# Altium PCB PC110.PcbDoc (part 24 of 24)
Units mm, origin at the board's own origin, x right, y up, seen from the top; angles counter-clockwise.
Board outline 150.05 x 107.35 mm, 10 copper layers (In2.Cu, F.Cu, B.Cu, In1.Cu, In3.Cu, In4.Cu, In5.Cu, In6.Cu, In7.Cu, In8.Cu); 936 components, 1434 nets, 4891 pads, 6088 vias.
Unrouted connection lines stored in the file: 2995.
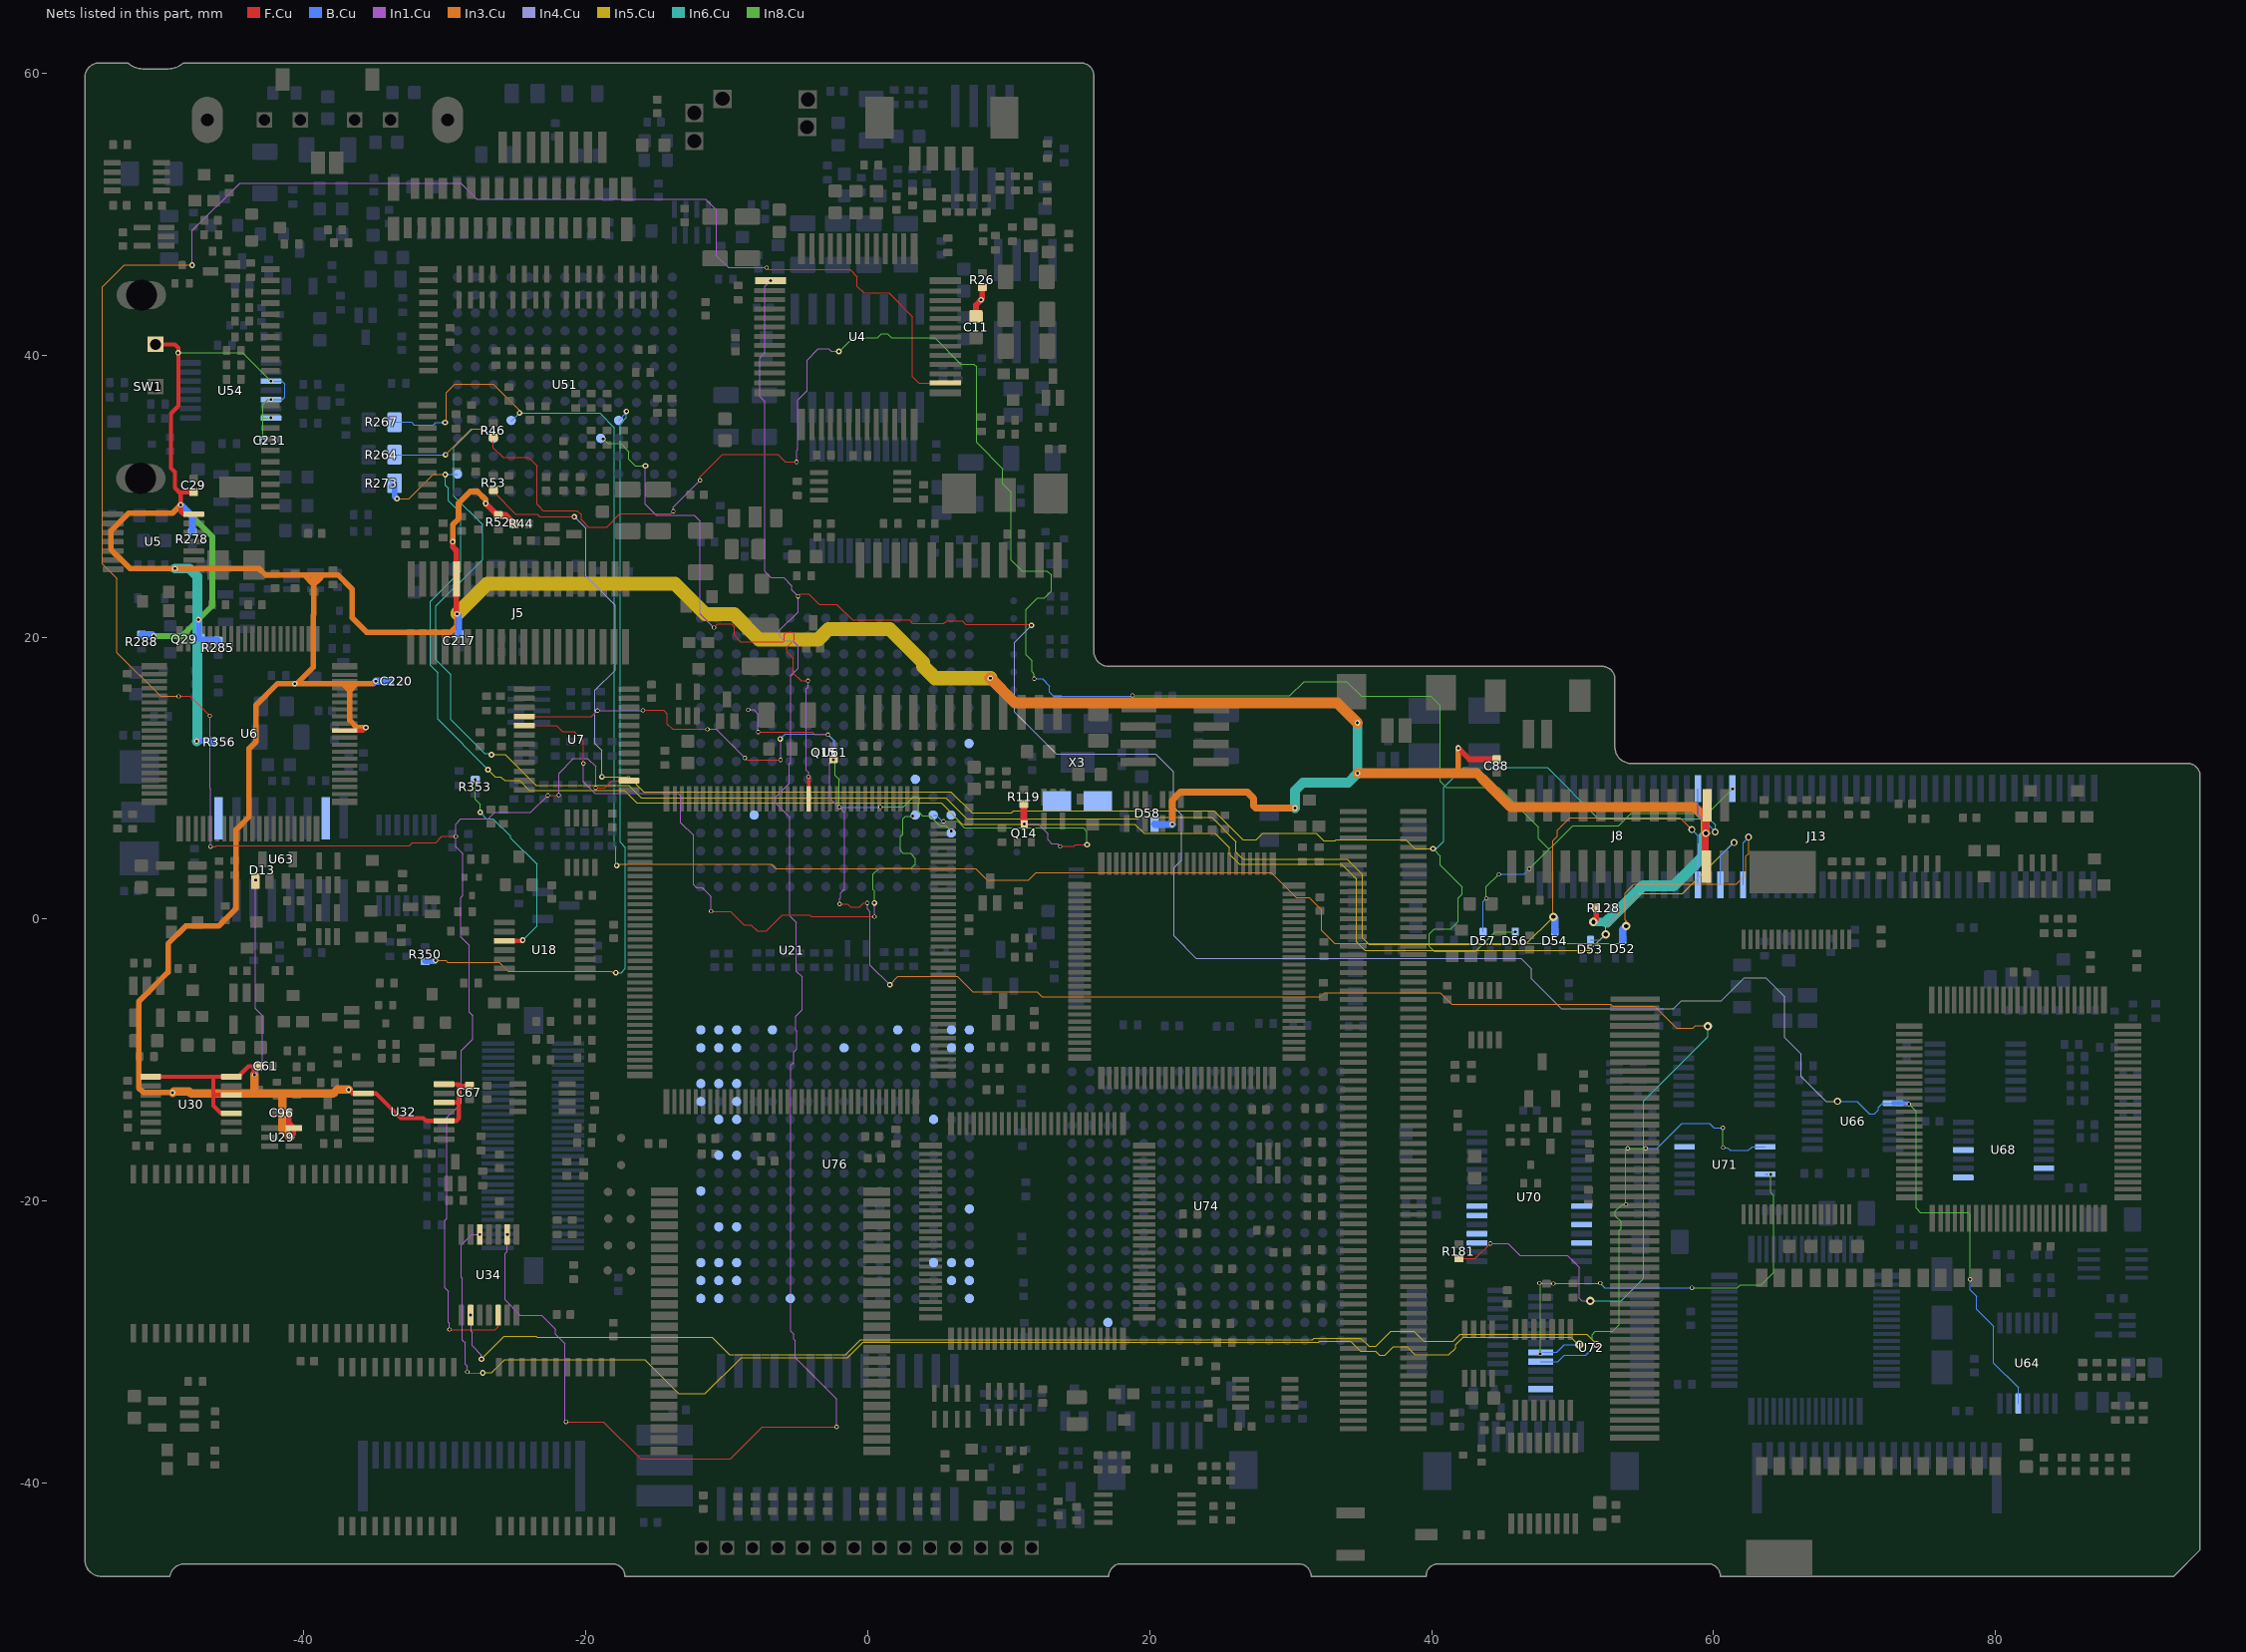
[diagram p31: the nets of this part, all layers, seen from the top]

## Via types
v1: diameter 0.3, hole 0.2, B.Cu to In8.Cu, tented both sides, 1934 vias
v2: diameter 0.4, hole 0.2, F.Cu to B.Cu, tented both sides, 1902 vias
v3: diameter 0.3, hole 0.2, F.Cu to In1.Cu, tented both sides, 1729 vias
v4: diameter 0.6, hole 0.3, F.Cu to B.Cu, tented both sides, 354 vias
v5: diameter 0.5, hole 0.3, F.Cu to B.Cu, tented both sides, 136 vias
v6: diameter 0.4, hole 0.2, B.Cu to In8.Cu, tented both sides, 12 vias
v7: diameter 0.3, hole 0.2, F.Cu to B.Cu, tented both sides, 6 vias
v8: diameter 0.6, hole 0.2, F.Cu to B.Cu, tented both sides, 4 vias
v9: diameter 0.5, hole 0.2, B.Cu to In8.Cu, tented both sides, 3 vias
v10: diameter 0.5, hole 0.2, F.Cu to B.Cu, tented both sides, 2 vias
v11: diameter 0.4, hole 0.3, F.Cu to B.Cu, tented both sides, 2 vias
v12: diameter 0.3, hole 0.2, F.Cu to In4.Cu, tented both sides, 2 vias
v13: diameter 0.6, hole 0.3, B.Cu to In8.Cu, tented both sides, 1 vias
v14: diameter 0.3, hole 0.2, F.Cu to In3.Cu, tented both sides, 1 vias

## Nets (pads, with @x,y where several pads share a name; then routed paths per layer and width w, separated by ;. In a path a pad name is that pad's centre, name@x,y a point inside that pad or via, vN(x,y) a via of type N, cw(c..) or ccw(c..) an arc to the next point about the centre after c; other vN are vias at no path point) (continued)
unconnected-(U61-PadN10): U61.N10
unconnected-(U61-PadR12): U61.R12
unconnected-(U61-PadT8): U61.T8
unconnected-(U61-RAS1-PadD12): U61.D12
unconnected-(U63-1.84MHz-Pad1): U63.1
unconnected-(U63-12MHz-Pad7): U63.7
unconnected-(U68-Pad6): U68.6
unconnected-(U68-Pad8): U68.8
unconnected-(U68-Pad11): U68.11
unconnected-(U70-APWR_GOOD#-Pad13): U70.13
unconnected-(U70-AVCC-Pad9): U70.9
unconnected-(U70-AVCC-Pad11): U70.11
unconnected-(U70-BPWR_GOOD#-Pad19): U70.19
unconnected-(U70-BVCC-Pad21): U70.21
unconnected-(U70-BVCC-Pad22): U70.22
unconnected-(U70-OC#-Pad18): U70.18
unconnected-(U71-Pad6): U71.6
unconnected-(U72-B8-Pad14): U72.14
unconnected-(U74-IRQ12-PadB3): U74.B3
unconnected-(U76-BOFF#-PadC5): U76.C5
unconnected-(U76-BREQ-PadA10): U76.A10
unconnected-(U76-BS8#-PadB6): U76.B6
unconnected-(U76-LOCK#-PadB4): U76.B4
unconnected-(U76-NC-PadA1): U76.A1
unconnected-(U76-NC-PadA2): U76.A2
unconnected-(U76-NC-PadA14): U76.A14
unconnected-(U76-NC-PadA15): U76.A15
unconnected-(U76-NC-PadA16): U76.A16
unconnected-(U76-NC-PadB1): U76.B1
unconnected-(U76-NC-PadB2): U76.B2
unconnected-(U76-NC-PadB14): U76.B14
unconnected-(U76-NC-PadB15): U76.B15
unconnected-(U76-NC-PadB16): U76.B16
unconnected-(U76-NC-PadC1): U76.C1
unconnected-(U76-NC-PadC2): U76.C2
unconnected-(U76-NC-PadC4): U76.C4
unconnected-(U76-NC-PadC6): U76.C6
unconnected-(U76-NC-PadC8): U76.C8
unconnected-(U76-NC-PadC14): U76.C14
unconnected-(U76-NC-PadC15): U76.C15
unconnected-(U76-NC-PadJ2): U76.J2
unconnected-(U76-NC-PadP6): U76.P6
unconnected-(U76-NC-PadP14): U76.P14
unconnected-(U76-NC-PadR1): U76.R1
unconnected-(U76-NC-PadR2): U76.R2
unconnected-(U76-NC-PadR14): U76.R14
unconnected-(U76-NC-PadR15): U76.R15
unconnected-(U76-NC-PadT1): U76.T1
unconnected-(U76-NC-PadT2): U76.T2
unconnected-(U76-NC-PadT11): U76.T11
unconnected-(U76-NC-PadT14): U76.T14
unconnected-(U76-NC-PadT15): U76.T15
unconnected-(U76-NC-PadT16): U76.T16
unconnected-(U76-PCD-PadC12): U76.C12
unconnected-(U76-PCHK#-PadA5): U76.A5
unconnected-(U76-PLOCK#-PadA4): U76.A4
unconnected-(U76-PWT-PadB12): U76.B12
unconnected-(U76-TCK-PadB8): U76.B8
unconnected-(U76-TDI-PadM1): U76.M1
unconnected-(U76-TDO-PadF16): U76.F16
unconnected-(U76-TMS-PadN2): U76.N2
unconnected-(U76-UP#-PadE1): U76.E1
unconnected-(X3-Pad2): X3.2
unconnected-(X3-Pad3): X3.3
UNKNOWN1: U7.4 U61.R13 | length 40.7
  F.Cu w0.08: U7.4@-24.362,14.375 -19.595,14.375 v3(-19.17,14.8) ; v3(-15.95,14.82) -14.47,14.82 -14.21,14.56 -14.21,13.84 -13.84,13.47 v3(-11.37,13.47) ; v3(-8.72,11.44) -8.58,11.3 v3(-6.18,11.3)
  In1.Cu w0.08: v3(-19.17,14.8) -15.97,14.8 v3(-15.95,14.82) ; v3(-11.37,13.47) -10.75,13.47 v3(-8.72,11.44) ; v2(-6.21,12.79) -6.18,12.76 v3(-6.18,11.3)
  In8.Cu w0.08: v1(-2.31,11.92) -2.31,10.19 -2.02,9.9 v1(-2.02,7.95) ; v1(0.9,7.96) 2.54,7.96 3.28,8.7 3.5,8.7 3.68,8.52 3.68,8.23 3.58,8.13 3.58,7.64 3.88,7.34 4.41,7.34 5.11,6.64 5.53,6.64 v1(5.92,6.25)
  B.Cu w0.08: v2(-6.21,12.79) -5.86,13.14 -2.84,13.14 -2.31,12.61 v1(-2.31,11.92) ; v1(-2.02,7.95) 0.89,7.95 v1(0.9,7.96)
UNKNOWN2: U7.5 U61.N12 | length 48
  F.Cu w0.08: U7.5@-24.362,13.725 -22.065,13.725 -21.64,13.3 -20.83,13.3 -20.17,12.64 v3(-20.17,11.05) ; v3(-11.11,0.56) -9.74,0.56 -8.78,-0.4 -8.27,-0.4 -7.84,-0.83 -7.18,-0.83 -6.05,0.3 -4.13,0.3 -4.02,0.19 0.47,0.19 v3(0.48,0.18)
  In1.Cu w0.08: v3(-20.17,11.05) -20.17,9.75 -19.35,8.93 -13.44,8.93 -13.27,8.76 -13.27,6.85 -12.36,5.94 -12.36,2.44 -12.16,2.24 -11.76,2.24 -11.11,1.59 v3(-11.11,0.56) ; v2(0.47,1.16) 0.47,0.19 v3(0.48,0.18)
  In8.Cu w0.08: v2(0.47,1.16) 0.47,2.02 0.38,2.11 0.38,3.19 0.83,3.64 3.11,3.64 3.39,3.92 3.39,4.31 3.03,4.67 2.5,4.67 2.31,4.86 2.31,5.84 2.49,6.02 2.49,7.12 2.68,7.31 v1(3.19,7.31)
VCC: C29.1 C61.1 C67.2 C88.2 C96.2 C217.1 C220.2 C231.2 D13.2 D58.2 J5.16 J8.2 J8.25 Q29.3 R44.1 R52.2 R128.1 R278.2 R285.2 R288.1 R356.2 SW1.1 U5.14 U6.71 U29.5 U30.1 U30.10 U30.12 U30.14 U32.2 U32.10 U32.12 U32.14 U54.10 U54.12 U54.14 | length 380.4
  F.Cu w0.3: U30.1@-50.86,-11.17 -46.42,-11.17 ; SW1.1@-50.52,40.77 -49.16,40.77 -48.9,40.51 -48.9,39.79 ; v2(-48.92,40.17) -48.9,40.15 -48.9,39.79 ; v2(-48.73,29.39) -48.73,29.08 ; C29.1@-47.81,30.29 -48.62,30.29 -48.73,30.18 ; U5.14@-47.807,28.72 -48.55,28.72 -48.73,28.9 -48.73,29.08 ; -45.88,-13.76 -46.42,-13.22 -46.42,-12.44 ; U30.12@-45.135,-12.47 -46.39,-12.47 -46.42,-12.44 ; v14(-43.5,-11.03) -43.55,-10.98 -43.55,-10.43 ; C61.1@-43.17,-10.43 -43.55,-10.43 ; v2(-40.95,-15.48) -40.71,-15.24 U29.5@-40.71,-14.81 ; U6.71@-37.1,13.38 -35.81,13.38 v2(-35.6,13.59) ; v2(-36.82,-12.09) -36.56,-12.35 U32.2@-35.78,-12.35 -34.89,-12.35 -33.13,-14.11 -33.12,-14.1 -31.53,-14.1 -31.33,-14.3 U32.10@-30.055,-14.3 -29.18,-14.3 -29,-14.12 -29,-12.96 ; U32.12@-30.055,-13 -29.06,-13 -29.02,-12.96 -29,-12.96 ; U32.14@-30.055,-11.7 -29.01,-11.7 ; C67.2@-28.25,-11.81 -28.9,-11.81 -29.01,-11.7 ; -48.9,39.79 -48.9,36.4 -49.43,35.87 -49.43,32 -49.15,31.72 -49.15,30.6 -48.73,30.18 ; -48.73,29.08 -48.73,30.18 ; -46.42,-12.44 -46.42,-11.17 ; -46.42,-11.17 U30.14@-45.135,-11.17 -44.67,-11.17 -43.93,-10.43 -43.55,-10.43 ; -29.01,-11.7 -29,-11.71 -29,-12.96
  F.Cu w0.4: C96.2@-41.06,-13.73 -41.06,-14.46 U29.5@-40.71,-14.81 ; v2(-29.44,26.77) -29.44,26.4 -29.18,26.14 J5.16@-29.18,24.13 -29.19,24.12 -29.19,21.72 v2(-29.13,21.66) ; v2(-27.1,29.49) -26.28,28.67 R52.2@-26.2,28.67 -25.68,28.67 R44.1@-25.06,28.05 ; v2(41.89,12.13) 42.67,11.35 C88.2@44.61,11.35 ; v4(51.48,-0.19) 51.68,0.01 R128.1@51.68,0.79
  F.Cu w0.5: J8.25@59.49,3.73 59.41,3.81 59.41,6.06 v5(59.45,6.1) 59.45,7.99 J8.2@59.54,8.08
  In1.Cu w0.08: v14(-43.5,-11.03) -42.92,-10.45 -42.92,-6.86 -43.42,-6.36 v3(-43.42,2.77)
  In3.Cu w0.08: -40.96,-15.48 v2(-40.95,-15.48) -40.95,-15.43
  In3.Cu w0.4: v2(-49.31,-12.31) -49.34,-12.28 -51.39,-12.28 -51.7,-11.97 -51.7,-5.83 -49.63,-3.76 -49.63,-1.74 -48.37,-0.48 -46.04,-0.48 -44.81,0.75 -44.81,6.34 -43.88,7.27 -43.88,12.11 -43.39,12.6 -43.39,15.18 -41.86,16.71 v2(-40.64,16.71) ; v2(-48.73,29.39) -49.32,28.8 -52.43,28.8 -53.68,27.55 -53.68,26.22 -52.33,24.87 v2(-49.14,24.87) -43.18,24.87 -42.73,24.42 -39.99,24.42 ; v2(-35.6,13.59) -36.23,13.59 -36.74,14.1 -36.74,15.94 ; v2(-34.9,16.88) -35.07,16.71 -36.23,16.71 ; v2(-29.44,26.77) -29.44,27.98 -29.02,28.4 -29.02,29.5 -28.19,30.33 -27.68,30.33 -27.1,29.75 v2(-27.1,29.49) ; v2(-29.13,21.66) -29.13,20.82 -29.6,20.35 -35.54,20.35 -36.57,21.38 -36.57,23.4 -37.59,24.42 -38.55,24.42 ; 41.87,10.35 41.89,10.37 v2(41.89,12.13) ; v2(-40.64,16.71) -37.31,16.71 ; v2(-40.64,16.71) -40.49,16.71 -39.34,17.86 -39.34,21.58 -39.3,21.62 -39.3,23.72 ; -39.99,24.42 -39.3,23.73 -39.3,23.72 ; -39.99,24.42 -39.3,24.42 ; -39.3,23.72 -39.3,24.42 ; -39.3,23.72 -38.935,24.085 ; -39.3,24.42 -38.965,24.085 -38.935,24.085 ; -39.3,24.42 -38.55,24.42 ; -38.935,24.085 -38.6,24.42 -38.55,24.42 ; -37.31,16.71 -37.25,16.71 -36.74,16.2 ; -37.31,16.71 -36.74,16.71 ; -36.74,15.94 -36.74,16.71 ; -36.74,15.94 -36.74,16.2 ; -36.74,16.2 -36.23,16.71 ; -36.74,16.71 -36.23,16.71
  In3.Cu w0.5: v2(21.6,6.73) 21.6,8.44 22.17,9.01 26.93,9.01 27.37,8.57 27.37,8.04 27.53,7.88 v2(30.3,7.88)
  In3.Cu w0.6: v2(-49.31,-12.31) -49.23,-12.23 -48.12,-12.23 -47.99,-12.36 -43.51,-12.36 ; v14(-43.5,-11.03) -43.51,-11.04 -43.51,-12.36 ; -40.96,-15.48 -41.51,-14.93 -41.51,-12.36 ; v2(-36.82,-12.09) -37.64,-12.09 -37.91,-12.36 -41.51,-12.36 ; 59.33,7.25 59.38,7.2 59.38,6.17 v5(59.45,6.1) ; -43.51,-12.36 -41.51,-12.36
  In3.Cu w0.7: v2(34.74,10.35) 41.87,10.35 43.21,10.35 43.86,9.7 45.6,7.96 46.38,7.96 58.62,7.96 59.33,7.25
  In3.Cu w0.8: v2(8.69,17.09) 10.43,15.35 33.31,15.35 v2(34.73,13.93)
  In5.Cu w1: -29.1,21.66 -29.1,21.69 -26.99,23.8 -13.68,23.8 -11.51,21.63 -9.49,21.63 -7.7,19.84 -3.51,19.84 -2.78,20.57 1.56,20.57 3.92,18.21 3.92,17.94 4.77,17.09 v2(8.69,17.09)
  In6.Cu w0.5: -47.56,21.34 v2(-47.47,21.25)
  In6.Cu w0.6: v4(51.48,-0.19) 52.42,-0.19 ; 59.26,5.23 59.26,5.91 v5(59.45,6.1)
  In6.Cu w0.7: v2(-49.14,24.87) -48.12,24.87 -47.56,24.31 -47.56,21.34 -47.56,12.67 v2(-47.6,12.63) ; v2(30.3,7.88) 30.3,9.12 30.87,9.69 34.08,9.69 v2(34.74,10.35) 34.74,13.92 v2(34.73,13.93)
  In6.Cu w0.8: 52.42,-0.19 52.89,0.28 54.98,2.37 55.37,2.37 57.17,2.37 57.73,2.93 59.26,4.46 59.26,5.23
  In8.Cu w0.08: v2(-48.92,40.17) -44.34,40.17 v1(-42.33,38.16) ; -48.73,29.37 v2(-48.73,29.39) ; v1(-42.9,33.95) -42.9,35.57 ; v1(-42.33,35.56) -42.89,35.56 -42.9,35.57 ; v1(-42.33,36.86) -42.55,36.86 -42.9,36.51 -42.9,35.57
  In8.Cu w0.4: v2(-50.65,20.08) -48.64,20.08 v2(-47.47,21.25) -46.49,22.23 -46.49,27.13 -48.73,29.37
  B.Cu w0.08: v1(-42.33,36.86) -41.53,36.86 -41.35,37.04 -41.35,37.96 -41.55,38.16 v1(-42.33,38.16)
  B.Cu w0.4: v2(-47.6,12.63) -46.54,12.63 R356.2@-46.48,12.57 ; v2(-47.47,21.25) -47.47,19.86 Q29.3@-47.48,19.85 -46.16,19.85 R285.2@-46.07,19.76 ; v2(-29.13,21.66) -28.99,21.52 -28.99,20.23 C217.1@-28.97,20.21
  B.Cu w0.5: R288.1@-51.5,20.19 -50.76,20.19 v2(-50.65,20.08) ; v2(-48.73,29.39) -47.91,28.57 R278.2@-47.91,27.47 ; v2(-34.9,16.88) C220.2@-33.9,16.88 ; D58.2@20.35,6.75 20.37,6.73 v2(21.6,6.73)
VGA_ADDHI: U21.124 U51.J10 | length 39.5
  F.Cu w0.08: v3(-10.9,20.68) -10.65,20.93 -9.67,20.93 -9.46,20.72 -9.46,20.13 -9.02,19.69 -5.985,19.69 -5.92,19.755 -5.92,20.21 -5.77,20.36 -5.37,20.36 -5.21,20.2 -5.21,19.8 -5.73,19.28 -5.73,18.971 -5.27,18.511 -5.27,17.45 -4.73,16.91 v3(-4.23,16.91)
  F.Cu w0.25: v3(-4.2,10.11) -4.18,10.09 U21.124@-4.18,8.535
  In1.Cu w0.08: v2(-15.77,32.15) -15.77,29.43 -14.99,28.65 -12.31,28.65 -11.89,28.23 -11.89,21.67 v3(-10.9,20.68) ; v3(-4.23,16.91) -4.23,16.46 -4.35,16.34 -4.35,10.57 -4.2,10.42 v3(-4.2,10.11)
  In8.Cu w0.08: v1(-18.76,34.06) -18.43,33.73 -17.53,33.73 -16.96,33.16 -16.96,32.63 -16.48,32.15 v2(-15.77,32.15)
  B.Cu w0.08: U51.J10@-18.94,34.11 -18.89,34.06 v1(-18.76,34.06)
VGA_Blue: D54.3 J13.65 R264.1 U51.C10 | length 143.2
  In3.Cu w0.08: v2(-29.95,32.94) -28.11,34.78 v2(-27.23,34.78) ; v4(48.64,0.17) 48.61,0.2 48.61,5.57 48.93,5.89 48.93,6.31 49.8,7.18 57.63,7.18 v5(58.46,6.35)
  In5.Cu w0.08: v2(-26.69,11.67) -25.73,11.67 -23.54,9.48 -16.95,9.48 -16.08,8.61 5.54,8.61 7.02,7.13 19.2,7.13 19.29,7.22 24.41,7.22 26.13,5.5 26.13,4.74 26.6,4.27 34.01,4.27 35.11,3.17 35.11,-1.34 35.56,-1.79 46.67,-1.79 48.63,0.17 v4(48.64,0.17)
  In6.Cu w0.08: v2(-27.23,34.78) -28.04,34.78 -29.36,33.46 -29.36,30.01 -27.32,27.97 -27.32,25.52 -30.625,22.215 -30.625,18.405 -29.555,17.335 -29.555,14.535 -29.57,14.52 -29.57,14.15 -27.17,11.75 -26.77,11.75 v2(-26.69,11.67)
  B.Cu w0.08: R264.1@-33.567,32.95 -29.96,32.95 v2(-29.95,32.94) ; v2(-27.23,34.78) -27.23,34.77 -26.57,34.11 U51.C10@-26.56,34.11 ; v5(58.46,6.35) 58.89,5.92 J13.65@58.89,2.45
  B.Cu w0.5: v4(48.64,0.17) 48.74,0.07 D54.3@48.74,-0.9
VGA_CLK: R350.1 U51.K9 | length 55.4
  In3.Cu w0.08: v2(-30.66,-2.93) -29.94,-2.93 -29.81,-3.06 -26.14,-3.06 -25.52,-3.68 -18.18,-3.68 -18.07,-3.79 v2(-17.87,-3.79)
  In6.Cu w0.08: v2(-17.87,-3.79) -17.49,-3.79 -17.2,-3.5 -17.2,5.09 -17.56,5.45 -17.56,35.13 -17.12,35.57 v2(-17.12,36.02)
  B.Cu w0.08: U51.K9@-17.67,35.38 -17.12,35.93 v2(-17.12,36.02)
  B.Cu w0.4: R350.1@-31.39,-2.99 -30.72,-2.99 v2(-30.66,-2.93)
VGA_Green: D53.3 J13.67 R273.1 U51.A12 | length 134.8
  In3.Cu w0.08: v2(-33.39,29.82) -32.53,29.82 -30.81,31.54 v2(-29.97,31.54)
  In5.Cu w0.08: v2(-26.94,10.61) -26.43,10.1 -26.04,10.1 -25.77,9.83 -24.71,9.83 -24.01,9.13 -17.26,9.13 -16.37,8.24 5.22,8.24 6.72,6.74 18.95,6.74 19.6,6.09 24.62,6.09 25.64,5.07 25.64,4.62 26.37,3.89 33.62,3.89 34.67,2.84 34.67,-1.6 35.27,-2.2 51.18,-2.2 52.3,-1.08 v4(52.35,-1.08) 52.35,-0.5 54.68,1.83 57.79,1.83 61.39,5.43 v5(61.45,5.43)
  In6.Cu w0.08: v2(-29.97,31.54) -29.97,30.77 -29.75,30.55 -29.75,29.69 -28.87,28.81 -28.87,24.69 -31.01,22.55 -31.01,18 -30.48,17.47 -30.48,14.18 -26.94,10.64 v2(-26.94,10.61)
  B.Cu w0.08: v2(-29.97,31.54) -29.94,31.57 U51.A12@-29.1,31.57 ; D53.3@51.26,-1.48 51.95,-1.48 v4(52.35,-1.08) ; J13.67@60.49,2.45 60.49,4.47 v5(61.45,5.43)
  B.Cu w0.4: R273.1@-33.567,30.92 -33.567,29.997 v2(-33.39,29.82)
VGA_HSync: D56.3 J13.36 R53.1 | length 135.3
  F.Cu w0.08: R53.1@-26.54,30.44 -26.54,30.3 -24.96,28.72 -23.47,28.72 -23.29,28.54 v2(-20.81,28.54)
  In4.Cu w0.08: v2(-20.81,28.54) -20,27.73 -20,24.33 -17.92,22.25 -17.92,17.66 -19.34,16.24 -19.34,12.45 -18.85,11.96 v2(-18.85,10.1)
  In5.Cu w0.08: v2(-18.85,10.1) -17.04,10.1 -17.01,10.13 -16.96,10.13 -15.88,9.05 5.89,9.05 7.4,7.54 10.21,7.54 10.36,7.69 24.57,7.69 26.62,5.64 27.55,5.64 28.02,6.11 31.79,6.11 32.34,5.56 33.14,5.56 33.21,5.63 38.17,5.63 38.8,5 v2(40.1,5)
  In6.Cu w0.08: v2(40.1,5) 40.325,5 40.86,5.535 40.86,9.34 42.27,10.75 48.2,10.75 51.81,7.14 59.67,7.14 60.11,6.7 v5(60.11,6.19)
  In8.Cu w0.08: v2(40.1,5) 40.62,4.48 40.62,3.83 42.18,2.27 42.18,1.79 41.89,1.5 41.89,-0.17 41.36,-0.7 40.18,-0.7 39.82,-1.06 39.82,-1.92 40.19,-2.29 43.12,-2.29 44.51,-0.9 v1(45.93,-0.9)
  B.Cu w0.08: J13.36@58.89,9.25 58.89,7.41 v5(60.11,6.19)
VGA_Red: D52.3 J13.69 R267.1 U51.D9 | length 146.3
  In3.Cu w0.08: v2(-29.98,35.23) -29.89,35.32 -29.89,37.35 -29.3,37.94 -26.57,37.94 -24.7,36.07 v2(-24.7,35.91) ; v2(-17.81,3.81) -17.72,3.9 -6.85,3.9 -6.53,3.58 7.67,3.58 8.47,2.78 11.39,2.78 11.92,3.31 28.62,3.31 30.41,1.52 31.31,1.52 32.18,0.65 32.18,-0.78 33.1,-1.7 53.3,-1.7 53.74,-1.26 53.74,-0.54 v4(53.79,-0.49) 53.79,-0.13 53.72,-0.06 53.72,1.85 54.35,2.48 61.6,2.48 62.29,3.17 62.29,4.47 62.48,4.66 v5(62.48,5.82)
  In6.Cu w0.08: v2(-24.7,35.91) -19.01,35.91 -17.96,34.86 -17.96,5.19 -17.88,5.11 -17.88,3.88 v2(-17.81,3.81)
  B.Cu w0.08: R267.1@-33.567,35.25 -32.38,35.25 -32.2,35.07 -30.805,35.07 -30.645,35.23 v2(-29.98,35.23) ; U51.D9@-25.29,35.38 -25.23,35.38 v2(-24.7,35.91) ; J13.69@62.09,2.45 62.09,5.43 v5(62.48,5.82)
  B.Cu w0.5: D52.3@53.55,-1.47 53.55,-0.73 v4(53.79,-0.49)
VGA_VSync: D57.3 J13.33 R46.1 | length 147
  F.Cu w0.08: R46.1@-26.56,34.17 -26.56,33.44 -25.87,32.75 -24.07,32.75 -23.47,32.15 -23.47,29.42 -23.04,28.99 -20.62,28.99 -20.31,28.68 -20.31,28.33 -19.8,27.82 -18.52,27.82 -17.59,28.75 -13.98,28.75 v3(-13.79,28.94) ; v3(-11.89,31.13) -11.89,31.38 -10.31,32.96 -6.38,32.96 -5.85,32.43 v3(-5.05,32.43)
  In1.Cu w0.08: v3(-13.79,28.94) -13.79,29.23 v3(-11.89,31.13) ; v3(-5.05,32.43) -5.03,32.45 -5.03,33.26 -4.96,33.33 -4.96,36.83 -4.29,37.5 -4.29,39.66 -3.5,40.45 -2.77,40.45 -2.59,40.27 v2(-2.05,40.27)
  In8.Cu w0.08: v2(-2.05,40.27) -2.01,40.27 -1.12,41.16 -1.09,41.16 -1.02,41.23 0.69,41.23 0.98,41.52 1.4,41.52 1.69,41.23 4.75,41.23 6.61,39.37 7.53,39.37 7.72,39.18 7.72,33.81 9.57,31.96 9.57,30.88 10.18,30.27 10.18,25.47 10.94,24.71 12.71,24.71 13.02,24.4 13.02,23.29 12.53,22.8 12.04,22.8 11.22,21.98 11.22,18.75 11.64,18.33 11.64,17.56 11.81,17.39 v1(11.81,17.06) ; v1(18.78,15.87) 18.8,15.85 29.95,15.85 30.95,16.85 33.98,16.85 35.01,15.82 39.93,15.82 40.6,15.15 40.6,9.79 41.04,9.35 44.75,9.35 47.57,6.53 47.57,5.71 48.32,4.96 ; v1(43.88,1.48) 43.88,2.3 v1(44.77,3.19) ; v1(46.93,3.57) 50,6.64 53.28,6.64 54.15,7.51 59.6,7.51 v1(61.34,9.25)
  B.Cu w0.08: v1(11.81,17.06) 12.38,17.06 12.9,16.54 12.9,16.12 13.19,15.83 18.74,15.83 v1(18.78,15.87) ; D57.3@43.65,-0.9 43.65,1.25 v1(43.88,1.48) ; v1(44.77,3.19) 46.55,3.19 v1(46.93,3.57)
YellowWire1_2: Q15.1 R181.1 | length 125.7
  F.Cu w0.08: v3(-7.78,13.27) -3.93,13.27 -3.76,13.1 -2.84,13.1 v3(-2.83,13.09) ; v3(-1.99,1.08) -1.43,1.08 -1.22,0.87 -0.59,0.87 -0.31,1.15 v3(-0.03,1.15) ; R181.1@41.93,-24.07 43.1,-24.07 v3(44.17,-23)
  In1.Cu w0.08: v3(-8.48,14.85) -8.07,14.85 -7.78,14.56 v3(-7.78,13.27) ; v3(-2.83,13.09) -2.43,12.69 v3(-2.43,11.31) -2.7,11.04 -2.7,8.59 -1.65,7.54 -1.65,2.13 -1.93,1.85 -1.93,1.51 -1.99,1.45 v3(-1.99,1.08) ; v3(-0.03,1.15) -0.03,0.73 0.18,0.52 0.18,-3.26 v2(1.57,-4.65) ; v3(44.17,-23) 45.42,-23 46.28,-23.86 49.62,-23.86 50.46,-24.7 50.46,-26.89 50.65,-27.08 v4(51.26,-27.08)
  In3.Cu w0.08: v2(1.57,-4.65) 2.16,-4.06 6.36,-4.06 7.44,-5.14 12.01,-5.14 12.37,-5.5 32.13,-5.5 32.42,-5.21 40.61,-5.21 41.44,-6.04 52.71,-6.04 52.85,-6.18 55.82,-6.18 57.38,-7.74 58.52,-7.74 58.7,-7.56 59.54,-7.56 v4(59.58,-7.6)
  In6.Cu w0.08: v4(51.26,-27.08) 53.43,-27.08 55.02,-25.49 55.02,-12.9 59.58,-8.34 v4(59.58,-7.6)
YMF_CLK: R353.2 U18.3 | length 15.2
  F.Cu w0.3: U18.3@-25.775,-1.54 -24.52,-1.54 v2(-24.47,-1.49)
  In6.Cu w0.08: v2(-27.49,7.58) -27.05,7.14 -26.59,7.14 -25.32,5.87 -25.32,5.75 -23.46,3.89 -23.46,-0.48 v2(-24.47,-1.49)
  In8.Cu w0.08: v1(-27.84,9.9) -27.84,8.5 -27.49,8.15 v2(-27.49,7.58)
YMF_CS#_Buf: U4.14 U34.2 U64.12 U66.2 | length 263.6
  F.Cu w0.08: v3(-21.41,-35.65) -18.74,-35.65 -16.107,-38.283 -9.733,-38.283 -7.46,-36.01 v3(-2.2,-36.01) ; v3(-4.94,22.9) -4.78,23.06 -4.17,23.06 -3.44,22.33 -2.19,22.33 -1.09,21.23 2.94,21.23 3.18,20.99 5.41,20.99 5.59,21.17 6.69,21.17 6.96,20.9 11.55,20.9 v2(11.61,20.84)
  In1.Cu w0.08: v3(-25.57,-22.36) -25.57,-23.55 -25.73,-23.71 -25.73,-27.01 -24.64,-28.1 -23.12,-28.1 -22.14,-29.08 -22.14,-29.45 -21.47,-30.12 -21.47,-35.59 v3(-21.41,-35.65) ; v3(-6.9,45.29) -7.29,44.9 -7.29,40.18 -7.64,39.83 -7.64,37.06 -7.29,36.71 -7.29,24.67 -6.86,24.24 -5.97,24.24 -5.38,23.65 -5.38,23.34 v3(-4.94,22.9) -4.94,21.81 -6.24,20.51 -6.24,20.05 -5.92,19.73 -5.31,19.73 -4.94,19.36 -4.94,17.8 -5.47,17.27 -5.47,11.11 -5.56,11.02 -5.56,9.65 -6.52,8.69 -6.52,8.22 -5.53,7.23 -5.53,0.22 -5.07,-0.24 -5.07,-3.69 -4.66,-4.1 -4.66,-6.42 -5.11,-6.87 -5.11,-7.87 -5.04,-7.94 -5.04,-9.21 -5.26,-9.43 -5.26,-10.15 -5.46,-10.35 -5.46,-29.22 -5.26,-29.42 -5.26,-29.78 -5.15,-29.89 -5.15,-31.09 -2.2,-34.04 v3(-2.2,-36.01)
  In4.Cu w0.08: v2(11.61,20.84) 10.42,19.65 10.42,14.7 13.4,11.72 20.42,11.72 21.69,10.45 21.69,7.96 22.26,7.39 22.26,4.19 21.73,3.66 21.73,-1.2 23.3,-2.77 46.34,-2.77 47.09,-3.52 47.09,-4.23 49.2,-6.34 57.16,-6.34 57.73,-5.77 60.55,-5.77 62.17,-4.15 63.7,-4.15 65.05,-5.5 65.05,-8.41 66.2,-9.56 66.2,-11.14 67.98,-12.92 v5(68.79,-12.92)
  In8.Cu w0.08: v1(73.84,-13.11) 74.36,-13.63 74.36,-20.49 74.67,-20.8 78.04,-20.8 78.2,-20.96 v1(78.2,-25.54)
  B.Cu w0.08: v5(68.79,-12.92) 70.17,-12.92 71.06,-13.81 71.39,-13.81 71.675,-13.525 71.675,-13.355 71.98,-13.05 U66.2@72.733,-13.05 ; v1(78.2,-25.54) 78.2,-26.29 78.66,-26.75 78.66,-27.65 79.87,-28.86 79.87,-31.49 81.61,-33.23 U64.12@81.61,-34.353
  B.Cu w0.3: U66.2@72.733,-13.05 73.78,-13.05 v1(73.84,-13.11)
YMF_RD#_Buf: U34.5 U71.12 U72.18 | length 127.2
  F.Cu w0.08: v3(-28.4,-32.11) -28.3,-32.21 -27.35,-32.21 v2(-27.31,-32.17)
  In1.Cu w0.08: v3(-28.4,-32.11) -28.4,-31.73 -28.56,-31.57 -28.56,-30.05 -28.76,-29.85 -28.76,-25.5 -28.84,-25.42 -28.84,-23.1 -28.1,-22.36 v3(-27.52,-22.36)
  In5.Cu w0.08: v2(-27.31,-32.17) -26.67,-32.17 -25.75,-31.25 -15.81,-31.25 -13.41,-33.65 -11.53,-33.65 -8.96,-31.08 -1.42,-31.08 -0.34,-30 31.99,-30 32.05,-29.94 34.26,-29.94 34.94,-30.62 36.01,-30.62 36.3,-30.91 36.69,-30.91 37.28,-30.32 38.25,-30.32 38.81,-30.88 41.22,-30.88 41.69,-30.41 41.69,-30.18 42.23,-29.64 49.86,-29.64 50.4,-30.18 v4(50.49,-30.18)
  In8.Cu w0.08: v1(47.65,-25.82) 47.7,-25.87 47.7,-30.83 v1(47.71,-30.84) ; v1(48.64,-25.84) 48.66,-25.82 v1(51.96,-25.82) ; v1(58.46,-26.14) 61.69,-26.14 61.9,-25.93 63.38,-25.93 64.27,-25.04 64.27,-19.6 64.05,-19.38 v1(64.05,-18.1)
  B.Cu w0.08: v1(47.65,-25.82) 48.62,-25.82 v1(48.64,-25.84) ; v1(47.71,-30.84) 47.71,-30.745 U72.18@47.73,-30.725 48.885,-30.725 49.43,-30.18 v4(50.49,-30.18) ; v1(51.96,-25.82) 52.29,-26.15 58.45,-26.15 v1(58.46,-26.14) ; U71.12@63.663,-18.08 63.682,-18.1 v1(64.05,-18.1)
YMF_SA0_A0: U4.41 U7.14 U34.12 | length 195.5
  F.Cu w0.08: v7(-48.88,15.81) -48.05,15.81 v3(-46.66,14.42) ; v3(-46.61,5.15) -46.28,5.15 -46.21,5.22 -32.5,5.22 -32.29,5.43 -30.64,5.43 -30.2,5.87 v3(-29.22,5.87) ; v3(-29.67,-29.1) -26.41,-29.1 -26.22,-28.91 U34.12@-26.22,-28.085 ; v3(-22.69,8.79) -21.92,8.79 v3(-21.91,8.8) ; v3(-19.3,9.32) -18.65,9.32 -18.145,9.825 U7.14@-16.937,9.825 ; v3(-7.18,46.21) -7.04,46.07 -1.26,46.07 -0.76,45.57 -0.76,44.9 -0.27,44.41 1.49,44.41 3.18,42.72 3.18,38.5 3.64,38.04 U4.41@5.5,38.04
  In1.Cu w0.08: v2(-47.92,46.39) -47.92,48.83 -44.54,52.21 -28.88,52.21 -27.75,51.08 -11.49,51.08 -10.71,50.3 -10.71,47.03 -9.89,46.21 v3(-7.18,46.21) ; v3(-46.66,14.42) -46.66,9.28 -46.61,9.23 v3(-46.61,5.15) ; v3(-29.67,-29.1) -29.67,-28.66 -29.74,-28.59 -29.74,-26.41 -30,-26.15 -30,-21.39 -29.84,-21.23 -29.84,-14.06 -28.84,-13.06 -28.84,-9.32 -28.03,-8.51 -28.03,-6.84 -28.27,-6.6 -28.27,-1.86 -28.86,-1.27 -28.86,1.55 -28.74,1.67 -28.74,4.66 -29.22,5.14 v3(-29.22,5.87) -29.22,6.74 -28.85,7.11 -26.93,7.11 -26.46,7.58 -23.9,7.58 v3(-22.69,8.79) ; v3(-21.91,8.8) -21.91,10.34 -20.86,11.39 -19.87,11.39 -19.3,10.82 v3(-19.3,9.32)
  In3.Cu w0.08: v7(-48.88,15.81) -50.16,15.81 -53.25,18.9 -53.25,24.18 -54.27,25.2 -54.27,44.86 -52.74,46.39 v2(-47.92,46.39)
YMF_VSS_Res: Q14.3 R119.1 U61.P12 | length 19.2
  F.Cu w0.08: v3(13.65,5.17) 14.62,5.17 14.74,5.29 v2(15.56,5.29)
  F.Cu w0.5: R119.1@11.08,8.17 11.08,6.77 v3(11.1,6.75)
  In1.Cu w0.08: v3(11.1,6.75) 12.1,6.75 12.77,6.08 12.77,5.64 13.04,5.37 13.45,5.37 v3(13.65,5.17)
  In8.Cu w0.08: v1(5.37,6.95) 6.38,6.95 6.85,6.48 15.28,6.48 15.56,6.2 v2(15.56,5.29)
  B.Cu w0.08: U61.P12@4.64,7.38 4.86,7.38 5.29,6.95 v1(5.37,6.95)
YMF_WR#_Buf: U34.9 U71.9 U72.17 | length 118.7
  In1.Cu w0.08: v3(-28.17,-28.085) -28.11,-28.145 -28.11,-29.23 -28.06,-29.28 -28.06,-30.26 -27.4,-30.92 v2(-27.4,-31.2)
  In5.Cu w0.08: v2(-27.4,-31.2) -25.78,-29.58 -23.51,-29.58 -23.45,-29.64 -11.05,-29.64 -9.81,-30.88 -1.57,-30.88 -0.5,-29.81 31.56,-29.81 31.66,-29.71 34.97,-29.71 35.55,-30.29 36.05,-30.29 37.11,-29.23 38.72,-29.23 39.43,-29.94 41.52,-29.94 42.02,-29.44 50.99,-29.44 v5(51.7,-30.15)
  In8.Cu w0.08: v5(51.7,-30.15) 51.39,-29.84 51.39,-29.46 51.62,-29.23 52.83,-29.23 53.3,-28.76 53.3,-22.07 53.43,-21.94 53.43,-21.46 53.03,-21.06 53.03,-20.7 53.5,-20.23 v1(53.78,-20.23) ; v1(53.9,-16.25) v1(55.18,-16.25) ; v1(60.66,-14.8) 60.67,-14.81 v1(60.67,-16.2)
  B.Cu w0.08: U72.17@47.73,-31.375 48.965,-31.375 49.43,-30.91 50.94,-30.91 v5(51.7,-30.15) ; v1(53.78,-20.23) 53.78,-16.37 v1(53.9,-16.25) ; v1(55.18,-16.25) 55.98,-16.25 57.76,-14.47 59.7,-14.47 60.03,-14.8 v1(60.66,-14.8) ; v1(60.67,-16.2) 60.99,-16.2 61.19,-16.4 62.46,-16.4 62.73,-16.13 U71.9@63.663,-16.13
YMFDAC_OUTPUT: C11.2 R26.1 | length 2.3
  F.Cu w0.4: C11.2@7.68,42.755 7.68,43.57 v2(8.04,43.93) 8.12,44.01 8.12,44.81 R26.1@8.13,44.82
pads on no net: J2.31 J2.32 J2.33 J2.34 J4.5 J4.6 J6.3 J6.4 J7.3 J7.4 J11.51 J11.52 J15.61 J15.62 J16.21 J16.22 J17.9 J17.10 J18.5 J18.6 J19.19 J19.20 SW1.3 SW2.3 U3.9 U3.10 U36.34 X1.3 X3.5
copper on no net: | length 134.6
  F.Cu w0.08: -51.52,44.27 -50.81,43.56 ; v2(-50.84,42.53) v2@-50.81,42.56
  F.Cu w0.3: v2@-50.81,42.56 -50.81,43.56
  In1.Cu w0.254: -40.83,56.17 -39.92,56.17 -39.92,57.08 -40.83,57.08 -40.83,56.17 ; -39.941,56.61 ccw(c-40.38,56.61) -39.941,56.61
  In3.Cu w0.254: 77.5,-25.9 78.98,-25.9 78.98,-25.1 77.5,-25.1 77.5,-25.9
  B.Cu w0.08: -51.52,44.27 -50.84,43.59
  B.Cu w0.254: -28.4,60.19 -28.4,58.59 ccw(c-27.58,58.59) -26.76,58.59 -26.76,60.16 ; -17.94,60.2 -17.94,58.65 ccw(c-17.12,58.649) -16.3,58.65 -16.3,60.199 ; -24.11,55.85 ccw(c-24.11,56.54) -24.11,57.23 ; -24.11,55.85 ccw(c-24.11,56.54) -24.11,57.23 ; -24.11,55.85 -25.26,55.85 cw(c-25.26,56.54) -25.26,57.23 -24.11,57.23 ; -48.786,59.09 ccw(c-49.13,59.09) -48.786,59.09 ; -44.504,54.154 ccw(c-45.59,54.154) -44.504,54.154 ; -41.13,19.02 -39.16,19.02 -39.16,20.93 -41.13,20.93 -41.13,19.02 ; -40.491,-38.739 ccw(c-42.25,-38.739) -40.491,-38.739 ; -39.818,19.97 ccw(c-40.15,19.97) -39.818,19.97 ; -30.071,11.831 ccw(c-31.83,11.831) -30.071,11.831 ; -30.01,54.15 ccw(c-31.106,54.15) -30.01,54.15 ; -20.665,55.86 -19.5,55.87 ccw(c-19.5,56.56) -19.5,57.25 -20.65,57.25 ccw(c-20.65,56.56) -20.65,55.87 -20.665,55.86 ; 31.459,12.1 ccw(c29.7,12.1) 31.459,12.1 ; 31.559,-40.709 ccw(c29.8,-40.709) 31.559,-40.709 ; 58.78,-1.16 ccw(c57.1,-1.16) 58.78,-1.16 ; 58.81,-41.33 ccw(c57.13,-41.33) 58.81,-41.33 ; 73.922,-12.47 ccw(c73.89,-12.47) 73.922,-12.47
  B.Cu w0.3: v2(-51.57,29.84) -51.57,31.27 ; v2(-50.84,42.53) -50.84,43.59
  other v2: -51.35,-1.36 22.65,1.75 23.28,2.43 27.17,6.09 45.38,12.57 -24.69,32.18 -5.31,44.94 -20.29,58.81
  other v4: 91.4,-35.57

## Polygon pours and split planes (outlines as drawn)
GND on F.Cu "F.Cu-GND-9" (solid, remove dead copper, pour order 25): 27.08,-37.06 27.07,-43.38 32.55,-43.38 32.56,-37.06
GND on F.Cu "F.Cu-GND-8" (solid, remove dead copper, pour order 33): 38.32,9.43 38.32,8.38 38.94,8.38 38.94,6.23 34.19,6.24 34.19,9.44
GND on F.Cu "F.Cu-GND-7" (solid, remove dead copper, pour order 21): -55.26,-41.98 -51.63,-41.98 -50.19,-43.4 -50.19,-46.27 -54.64,-46.27 -55.26,-45.62
GND on F.Cu "F.Cu-GND-6" (solid, remove dead copper, pour order 22): -45.37,-43.14 -45.37,-35.23 -39.37,-35.23 -39.37,-43.14
GND on F.Cu "F.Cu-GND-5" (solid, remove dead copper, pour order 24): 27.05,15.76 27.05,9.45 32.55,9.45 32.55,15.76
GND on F.Cu "F.Cu-GND-4" (solid, remove dead copper, pour order 23): -34.74,16.23 -34.74,8.39 -28.81,8.39 -28.81,16.2
GND on F.Cu "F.Cu-GND-3" (solid, remove dead copper, pour order 26): 88.12,-42.19 88.12,-46.35 92.55,-46.35 93.12,-45.77 93.12,-42.21
GND on F.Cu "F.Cu-GND-2" (solid, remove dead copper, pour order 28): -55.29,55.68 -51.06,55.68 -51.05,59.95 -51.96,59.96 -52.66,60.36 -54.87,60.37 -55.26,59.98
GND on F.Cu "F.Cu-GND-1" (solid, remove dead copper, pour order 27): 11.33,60.31 11.33,56.13 15.64,56.14 15.651,59.966 15.245,60.31
GND on F.Cu "F.Cu-GND" (solid, remove dead copper, pour order 34): 38.86,-34.71 38.86,-37.99 37.42,-37.99 37.42,-37.63 35.8,-37.63 35.8,-37.99 34.43,-37.99 34.43,-34.71
GND on B.Cu "B.Cu-GND-5" (solid, remove dead copper, pour order 29): 88.2,-42.33 88.2,-46.36 92.51,-46.36 93.2,-45.69 93.2,-42.34
GND on B.Cu "B.Cu-GND-4" (solid, remove dead copper, pour order 30): -55.11,-42.13 -51.43,-42.13 -50.05,-43.52 -50.05,-46.34 -54.47,-46.34 -55.13,-45.71
GND on B.Cu "B.Cu-GND-3" (solid, remove dead copper, pour order 31): -55.48,55.57 -55.49,59.68 -54.91,60.3 -52.93,60.3 -52.43,59.8 -51.05,59.8 -51.05,55.56
GND on B.Cu "B.Cu-GND-2" (solid, remove dead copper, pour order 35): -41.76,5.36 -32.9,5.36 -32.9,5.18 -33.82,4.29 -33.82,0.27 -36.56,0.27 -36.56,3.15 -41.76,3.15
GND on B.Cu "B.Cu-GND-1" (solid, remove dead copper, pour order 37): -42.73,3.18 -42.73,5.37 -43.14,5.37 -43.14,4.661 -43.87,3.93 -46.67,3.93 -47.43,3.18
GND on B.Cu "B.Cu-GND" (solid, remove dead copper, pour order 32): 11.24,60.22 11.24,56.05 15.48,56.05 15.48,59.56 14.89,60.23
no net on B.Cu "B.Cu-" (solid, remove dead copper, pour order 38): 77.12,8.4 77.12,0.69 76.89,0.41 76.89,-2.23 78.04,-3.36 80.3,-3.36 80.3,-2.36 78.43,-2.36 77.89,-1.83 77.89,0.02 78.31,0.45 78.33,5.58 78.01,5.89 78.01,7.34 77.56,7.82 77.56,8.4
GND on In7.Cu "In7.Cu-GND" (solid, remove dead copper, pour order 12): -54.38,-45.22 -54.51,59 14.61,58.88 14.58,17.69 15.81,16.59 51.77,16.62 51.85,10.8 52.32,10.03 53.05,9.66 93.39,9.6 93.5,-44.06 92.17,-45.44 61.77,-45.48 61.45,-44.95 60.88,-44.52 60.28,-44.45 39.31,-44.4 38.82,-44.57 38.6,-44.83 38.38,-45.17 32.14,-45.18 31.93,-44.83 31.71,-44.66 31.23,-44.46 30.8,-44.39 17.41,-44.37 16.66,-44.47 16.17,-44.78 15.83,-45.17 15.6,-45.27 -15.83,-45.27 -16.3,-44.54 -16.75,-44.32 -17.44,-44.29 -49.86,-44.24 -50.48,-44.49 -50.77,-44.93 -50.93,-45.22
PNET1 on In2.Cu "In2.Cu-PNET1" (solid, remove dead copper, pour order 11): 156 vertices, not listed, extent -54.5,-45.48 93.5,59
PNET5 on In2.Cu "In2.Cu-PNET5-1" (solid, remove dead copper, pour order 9): 39.39,-3.72 29.68,-3.68 26.77,-0.77 26.76,0.7 28.1,2.1 50.87,2.06 57.8,-4.79 62.44,-4.82 62.44,-5.37 63.4,-6.33 72.02,-6.37 73.13,-7.47 73.17,-9.78 70.02,-12.91 69.04,-12.91 61.62,-20.29 57.65,-20.26 57.65,-26.17 51.17,-26.13 50.6,-26.89 48.85,-26.9 48.25,-26.36 48.22,-21.37 46.94,-19.97 46.94,-19.12 48.55,-19.12 51.17,-16.55 51.5,-16.22 51.5,-10.78 45.67,-4.92 45.66,-2.98 45.63,-2.86 45.55,-2.77 45.42,-2.72 40.47,-2.71
PNET5 on In2.Cu "In2.Cu-PNET5" (solid, remove dead copper, pour order 3): 7.85,34.72 -10.42,34.76 -10.46,41.73 -2.16,49.94 7.36,49.91 7.4,40.46 7.89,38.73 7.89,34.72
PNET3 on In2.Cu "In2.Cu-PNET3" (solid, remove dead copper, pour order 1): -13.14,-45.22 -13.15,-42.09 -11.11,-40.03 -11.14,-33.98 -10.69,-33.64 5.12,-33.68 5.13,-45.25
PNET8 on In2.Cu "In2.Cu-PNET8" (solid, remove dead copper, pour order 6): 24.09,-40.5 25.27,-39.4 25.22,-36.31 21.34,-32.44 19.88,-32.44 15.89,-36.28 15.89,-37.39 19.02,-40.5
PNET6 on In2.Cu "In2.Cu-PNET6" (solid, remove dead copper, pour order 4): 8.37,34.72 8.4,38.81 7.91,41.05 7.9,50.36 7.84,50.44 3.3,50.44 3.34,58.87 12.42,58.86 12.49,58.43 12.66,58.02 12.9,57.77 13.27,57.45 13.68,57.33 14.06,57.28 14.38,57.39 14.59,57.39 14.64,34.72
PNET9 on In2.Cu "In2.Cu-PNET9" (solid, remove dead copper, pour order 7): 30.11,-22.45 29.97,-22.57 25.8,-22.56 25.82,-29.5 26.46,-30.15 28.44,-30.15 29.59,-29.01 29.59,-26.05 29.65,-25.93 29.72,-25.87 29.88,-25.82 38.66,-25.87 39.7,-24.88 41.44,-24.86 42.09,-24.23 42.07,-20.3 37.98,-20.31 37.61,-20.01 36.96,-19.32 36.89,-12.84 35.49,-12.12 33.41,-12.08 32.92,-12.08 32.16,-12.9 32.18,-19.2 31.23,-19.89 30.93,-20.04 30.11,-20.04
PNET12 on In2.Cu "In2.Cu-PNET12" (solid, remove dead copper, pour order 10): 63,-3.88 63,-5.16 63.59,-5.77 72.2,-5.8 73.66,-7.22 73.67,-9.98 70.26,-13.46 69.61,-13.45 69.45,-13.46 69.34,-13.45 69.27,-13.45 61.79,-20.86 58.17,-20.84 58.2,-26.15 79.67,-26.21 84.51,-31.02 88.43,-31.02 88.44,0.2 65.37,0.28 65.03,-0.02 65.03,-1.87
PNET4 on In2.Cu "In2.Cu-PNET4" (solid, remove dead copper, pour order 2): -20.11,26.83 -19.88,27.07 -18.65,27.07 -17.37,25.73 -17.37,21.14 -15.16,18.96 -4.79,18.95 -1.65,15.88 14.23,15.88 15.18,16.8 15.66,16.59 15.88,16.56 42.11,16.51 42.11,12 40.11,12 38.56,13.52 30.79,13.54 30.36,13.79 29.94,13.89 29.61,13.89 29.24,13.82 28.91,13.67 28.69,13.54 -3.2,13.6 -5.97,16.39 -16.18,16.43 -20.11,20.36
PNET10 on In2.Cu "In2.Cu-PNET10" (solid, remove dead copper, pour order 8): 25.83,-22.01 25.79,-10.24 27.49,-8.29 42.16,-8.29 45.1,-11.22 45.11,-11.98 42.32,-14.79 42.32,-19.81 38.17,-19.8 37.49,-19.16 37.52,-12.41 37.52,-12.01 36.29,-11.66 36.02,-11.58 33.61,-11.58 32.8,-11.54 31.64,-12.66 31.62,-18.87 30.92,-19.44 30.01,-19.44 29.61,-19.83 29.61,-22.02
PNET7 on In2.Cu "In2.Cu-PNET7" (solid, remove dead copper, pour order 5): -18.24,-17.11 -18.27,-26.35 -16.42,-28.24 -14.58,-28.24 -12.46,-26.03 -12.46,-20.14 -15.38,-17.11
PNET2 on In2.Cu "In2.Cu-PNET2" (solid, remove dead copper, pour order 39): -19.37,-2.74 -20.24,-3.59 -24.07,-3.56 -24.91,-2.81 -24.93,0.58 -24.44,0.94 -20.01,0.91 -19.37,0.33
PNET5 on In3.Cu "In3.Cu-PNET5-3" (solid, remove dead copper, pour order 20): 81.55,-26.82 82.59,-26.82 82.59,-27.56 82.67,-27.63 83.84,-27.63 85.77,-25.75 85.77,-24.92 85.35,-24.47 85.35,-23.99 84.59,-23.19 82.52,-23.19 82.49,-23.14 82.49,-22.79 82.3,-22.56 79.92,-22.56 79.42,-23.07 78.24,-23.07 77.49,-22.31 77.06,-22.31 76.99,-22.38 73.75,-22.38 72.99,-21.61 71.91,-21.61 70.52,-23.01 63.67,-23.03 62.27,-21.64 62.04,-21.64 61.01,-20.63 61.01,-18.82 61.24,-18.6 61.46,-18.6 61.59,-18.47 62.77,-18.47 62.89,-18.59 65.31,-18.59 65.31,-19.66 65.58,-19.93 66.58,-19.93 67.03,-20.37 69.69,-20.37 70.2,-19.88 71.83,-19.88 73.07,-18.67 77.32,-18.65 77.37,-18.71 80.67,-18.71 80.76,-18.78 81.98,-18.78 81.98,-20.56 82.57,-21.17 86,-21.17 86.2,-21.41 87,-21.41 87,-23.21 87.12,-23.36 87.32,-23.43 87.61,-23.42 88.14,-23.42 88.15,-24.51 88.15,-26.07 86.15,-28.09 85.13,-28.12 83.9,-29.35 82.49,-29.35 82.37,-29.21 81.53,-29.21 81.28,-28.98 81.28,-27.09
PNET5 on In3.Cu "In3.Cu-PNET5-2" (solid, remove dead copper, pour order 19): 19.29,-7.96 19.21,-7.87 19.22,-6.52 19.37,-6.35 28.99,-6.35 29.09,-6.44 29.09,-7.3 29.04,-7.34 26.3,-7.34 26.3,-8.11 24.96,-8.11 24,-9.06 21.93,-9.06 21.49,-8.64 21.49,-8.01 21.2,-7.69 20.53,-7.69 20.28,-7.96
PNET5 on In3.Cu "In3.Cu-PNET5-1" (solid, remove dead copper, pour order 18): 64.55,4.89 64.57,5.56 65.4,5.57 65.83,5.12 70.43,5.13 70.46,7.06 70.57,7.18 72.43,7.18 72.66,6.98 72.67,6.04 72.3,5.79 71.23,5.79 71.23,4.8 69.85,3.38 66.05,3.38
PNET5 on In3.Cu "In3.Cu-PNET5" (solid, remove dead copper, pour order 17): -13.98,17.53 -13.35,16.89 -13.35,11.91 -14.09,11.16 -20.2,11.15 -22.81,8.57 -22.8,6.85 -22.3,6.35 -22.28,3.71 -22.78,3.69 -22.79,6.16 -23.3,6.66 -23.32,8.74 -20.42,11.64 -14.34,11.64 -13.84,12.13 -13.84,15.06 -14.3,15.06 -14.3,15.48 -15.02,15.48 -15.02,15.06 -16.25,15.06 -16.6,14.71 -16.85,14.71 -17.62,13.93 -28.35,13.93 -28.58,14.15 -28.58,15.78 -28.31,16.01 -26.17,16.01 -25.93,16.26 -19.47,16.26 -18.24,17.53
PNET5 on In4.Cu "In4.Cu-PNET5-2" (solid, remove dead copper, pour order 36): 64.19,4.88 64.53,5.12 64.56,5.52 65.05,5.52 65.29,5.1 65.28,3.96 64.93,3.56 56.1,3.56 55.66,4.06 55.67,6.07 55.77,6.18 56.62,6.18 56.74,6.01 56.74,5.4 57.09,5
PNET5 on In4.Cu "In4.Cu-PNET5-1" (solid, remove dead copper, pour order 16): 50.43,-19.85 51.36,-20.74 51.3,-25.68 49.82,-27.05 48.99,-27.07 48.76,-26.83 48.74,-26.22 49.69,-25.29 49.69,-24.41 49.25,-24.41 49.25,-22.25 48.5,-21.47 48.49,-21.22 47.56,-20.47 47.57,-19.83
PNET5 on In4.Cu "In4.Cu-PNET5" (solid, remove dead copper, pour order 15): 46.6,-4.26 47.98,-5.63 48,-7.09 48.5,-7.62 50.02,-7.66 50.5,-8.08 50.55,-10.21 50.68,-10.38 51.11,-10.39 51.18,-10.48 51.17,-11.13 51.08,-11.26 49.73,-11.24 49.56,-11.14 49.51,-10.9 49.51,-10.11 49.46,-10 49.13,-10 46.46,-7.3 46.46,-5.14 46.34,-5.02 45.82,-5.02 45.74,-5.01 45.69,-4.95 45.68,-4.41 45.73,-4.33 45.81,-4.27
PNET5 on In5.Cu "In5.Cu-PNET5" (solid, remove dead copper, pour order 14): -9.98,30.37 -9.99,28.9 -11.4,27.49 -18.35,27.48 -18.73,27.12 -23.28,27.13 -24.55,25.87 -24.74,25.75 -25.34,25.75 -25.46,25.96 -25.45,27.94 -24.02,29.4 -24.01,29.91 -23.64,30.31 -16.15,30.32 -14.66,28.84 -13.38,28.85 -11.63,30.58 -10.23,30.58 -9.99,30.4
PNET5 on In6.Cu "In6.Cu-PNET5" (solid, remove dead copper, pour order 13): -10.1,30.76 -10.59,31.26 -10.59,32.63 -9.31,33.93 -9.33,37.78 -9.96,38.41 -9.96,38.98 -9.72,39.22 -9.48,39.24 -8.81,39.91 -8.83,40.66 -8.52,41 -8.43,41.11 -8.39,41.2 -8.39,41.34 -8.45,41.46 -8.9,41.9 -10.76,41.91 -11.35,41.3 -11.35,37.77 -11.19,37.58 -11.12,37.51 -11.13,37.23 -11.15,37.14 -11.2,37.06 -11.2,36.33 -11.38,36.13 -11.39,35.2 -12.33,34.24 -12.35,32.32 -12.27,32.23 -12.24,32.16 -12.25,30.05 -12.05,29.84 -10.14,29.82 -10.07,29.82 -10.07,29.96 -10.05,30.01 -9.99,30.07 -9.96,30.14 -9.96,30.37 -10.01,30.42 -10.09,30.47

## Keep-outs
Edge.Cuts:
  circle w0.254: c60.11,-1.09 r0.6
  circle w0.254: c36.67,-37.41 r0.4
  circle w0.254: c91.69,5.7 r0.9
  circle w0.254: c-42.25,-38.73 r1.05
  circle w0.254: c-31.8,15.05 r0.52
  circle w0.254: c57.1,-1.15 r0.9
  circle w0.254: c-42.3,-41.89 r0.52
  circle w0.254: c57.13,-41.3 r0.9
  circle w0.254: c13.78,58.63 r0.9
  circle w0.254: c-34.84,21.75 r0.4
  circle w0.254: c42.99,5.78 r0.9
  circle w0.254: c36.56,8.85 r0.3
  circle w0.254: c29.79,-40.71 r1.05
  circle w0.254: c29.71,12.09 r1.05
  circle w0.254: c-52.7,-44.72 r0.9
  circle w0.254: c-31.83,11.84 r1.05
  circle w0.254: c60.13,-41.23 r0.6
  circle w0.254: c36.96,-43.67 r0.88
  circle w0.254: c88.51,5.75 r0.3
  circle w0.254: c90.54,-44.73 r0.9
  circle w0.254: c-14.61,21.72 r0.6
  circle w0.254: c46.17,5.77 r0.45
  lines w0: -49.611,60.31 ccw(c-49.665,61.972) -48.548,60.74 ; -49.611,60.31 -51.425,60.31 cw(c-51.382,61.925) -52.48,60.74 -54.465,60.74 ccw(c-54.485,59.685) -55.54,59.688 -55.54,-45.399 ccw(c-54.343,-45.42) -54.47,-46.61 -49.504,-46.61 cw(c-48.449,-46.79) -48.46,-45.72 -18.14,-45.72 cw(c-18.125,-46.615) -17.23,-46.61 17.083,-46.61 17.084,-46.61 cw(c18.06,-46.668) 17.82,-45.72 30.553,-45.72 cw(c30.542,-46.635) 31.457,-46.61 39.609,-46.61 cw(c40.481,-46.59) 40.41,-45.72 59.587,-45.72 cw(c59.588,-46.612) 60.48,-46.61 92.65,-46.61 94.51,-44.72 94.51,10.18 ccw(c93.62,10.16) 93.65,11.05 54.18,11.05 cw(c54.155,12.205) 53,12.188 53,17.031 ccw(c52.111,17.041) 52.121,17.93 17.116,17.93 cw(c17.108,18.998) 16.04,19 16.04,59.786 ccw(c15.114,59.814) 15.08,60.74 -48.548,60.74 ; -49.611,60.31 -49.611,60.31 ; -48.548,60.74 -48.548,60.74 ; -54.62,58.49 cw(c-53.72,58.49) -52.82,58.49 -52.81,57.97 cw(c-53.71,57.97) -54.61,57.97 -54.62,58.49
  lines w0.254: -51.425,58.92 cw(c-51.015,58.92) -50.605,58.92 ; -51.425,58.92 cw(c-51.015,58.92) -50.605,58.92 ; -51.425,58.92 -51.415,57.54 ccw(c-51.005,57.54) -50.595,57.54 -50.605,58.92 ; -49.611,60.31 ccw(c-49.665,61.972) -48.548,60.74 ; -49.611,60.31 -51.425,60.31 cw(c-51.382,61.925) -52.48,60.74 -54.465,60.74 ccw(c-54.485,59.685) -55.54,59.688 -55.54,-45.399 ccw(c-54.343,-45.42) -54.47,-46.61 -49.504,-46.61 cw(c-48.449,-46.79) -48.46,-45.72 -18.14,-45.72 cw(c-18.125,-46.615) -17.23,-46.61 17.083,-46.61 17.084,-46.61 cw(c18.06,-46.668) 17.82,-45.72 30.553,-45.72 cw(c30.542,-46.635) 31.457,-46.61 39.609,-46.61 cw(c40.481,-46.59) 40.41,-45.72 59.587,-45.72 cw(c59.588,-46.612) 60.48,-46.61 92.65,-46.61 94.51,-44.72 94.51,10.18 ccw(c93.62,10.16) 93.65,11.05 54.18,11.05 cw(c54.155,12.205) 53,12.188 53,17.031 ccw(c52.111,17.041) 52.121,17.93 17.116,17.93 cw(c17.108,18.998) 16.04,19 16.04,59.786 ccw(c15.114,59.814) 15.08,60.74 -48.548,60.74 ; -49.611,60.31 -49.611,60.31 ; -48.548,60.74 -48.548,60.74 ; -54.62,58.49 cw(c-53.72,58.49) -52.82,58.49 -52.81,57.97 cw(c-53.71,57.97) -54.61,57.97 -54.62,58.49

## Other copper
F.Cu:
  text "FC2 36H0723 02" at 79.16,-45.1 h0.7
In1.Cu:
  text "FC1 36H0723 01" at 84.24,-42.82 h0.7
In2.Cu:
  text "IP1 36H0724 01" at 84.1,-42.77 h0.7
In3.Cu:
  text "IC1 36H0726 01" at 84.52,-42.76 h0.7
In4.Cu:
  text "IC2 36H0726 01" at 84.34,-42.69 h0.7
In5.Cu:
  text "IC3 36H0726 01" at 84.39,-42.73 h0.7
In6.Cu:
  text "IC4 36H0723 01" at 84.34,-42.81 h0.7
In7.Cu:
  text "IP2 36H0724 01" at 84.01,-42.71 h0.7
In8.Cu:
  text "BC1 36H0732 01" at 92.98,-42.78 h0.7
B.Cu:
  text "Recreated with Love /   by Ahmad Byagowi" at -47.929,-24.25 h1.5 r90
  text "BC2 36H0732 02" at 92.84,-42.25 h0.7

## Silkscreen, mask and mechanical layers (free items; w line width, h text height)
B.SilkS:
  text "MADE IN KiCad" at -39.89,-32.994 h1
  text "MONOLITH" at -37.59,-35.88 h1.5
  text "2025" at -45.88,-37.48 h1